# Altium PCB PDB.PcbDoc
Units mil, origin at the board's own origin, x right, y up, seen from the top; angles counter-clockwise.
Board outline 4930 x 2490 mil, 2 copper layers (Top Layer, Bottom Layer); 48 components, 33 nets, 136 pads, 994 vias.
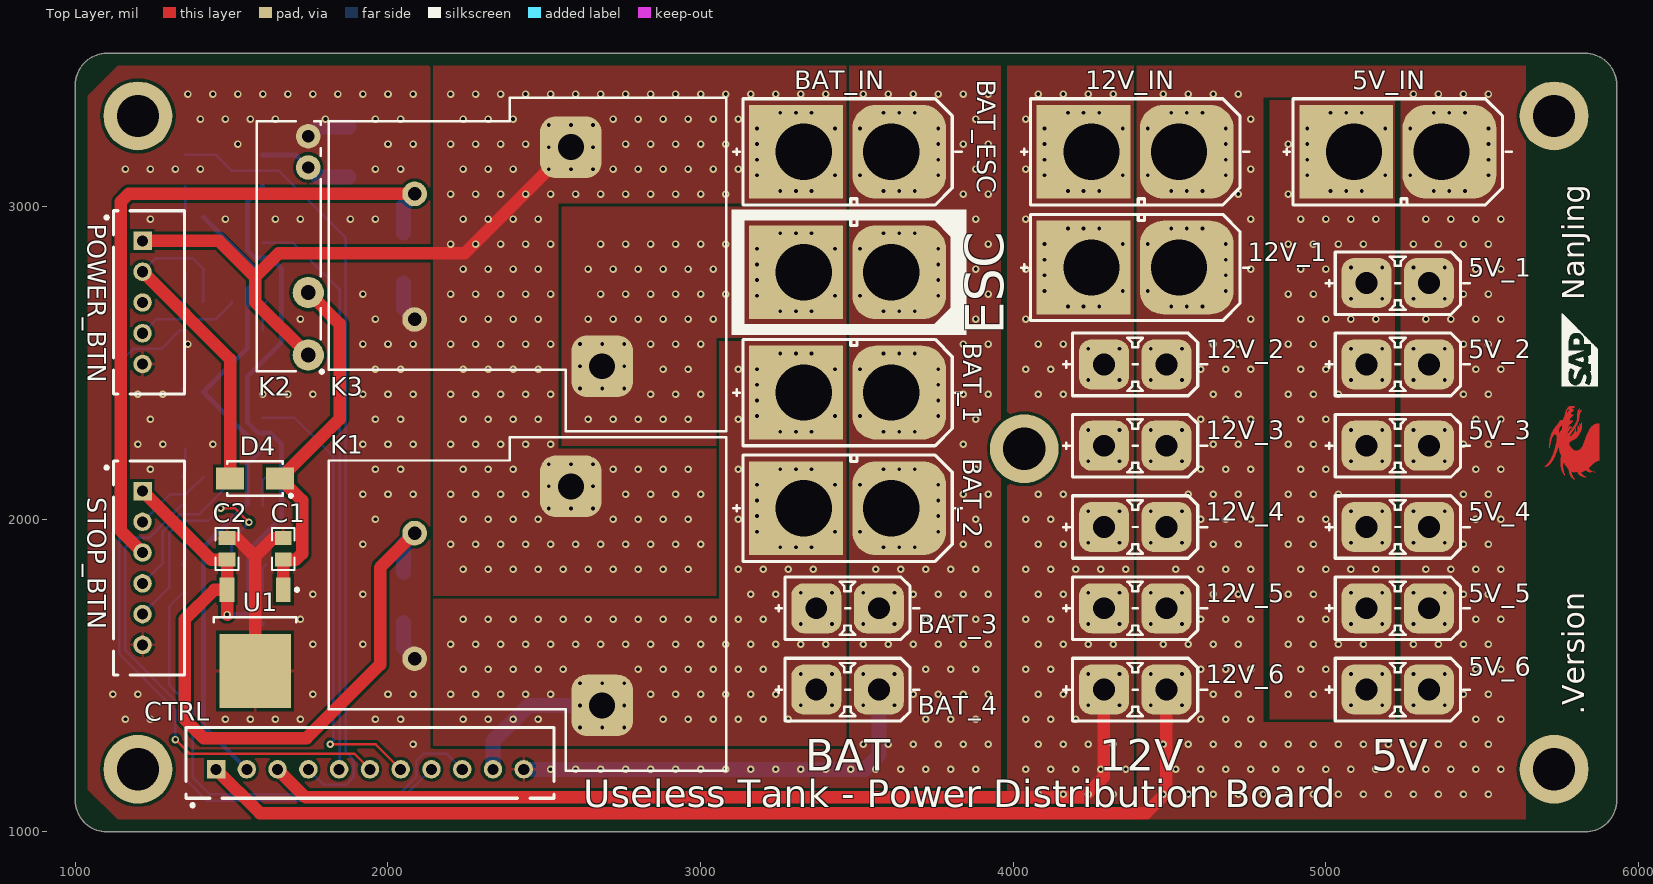
[diagram p0: Top Layer view]
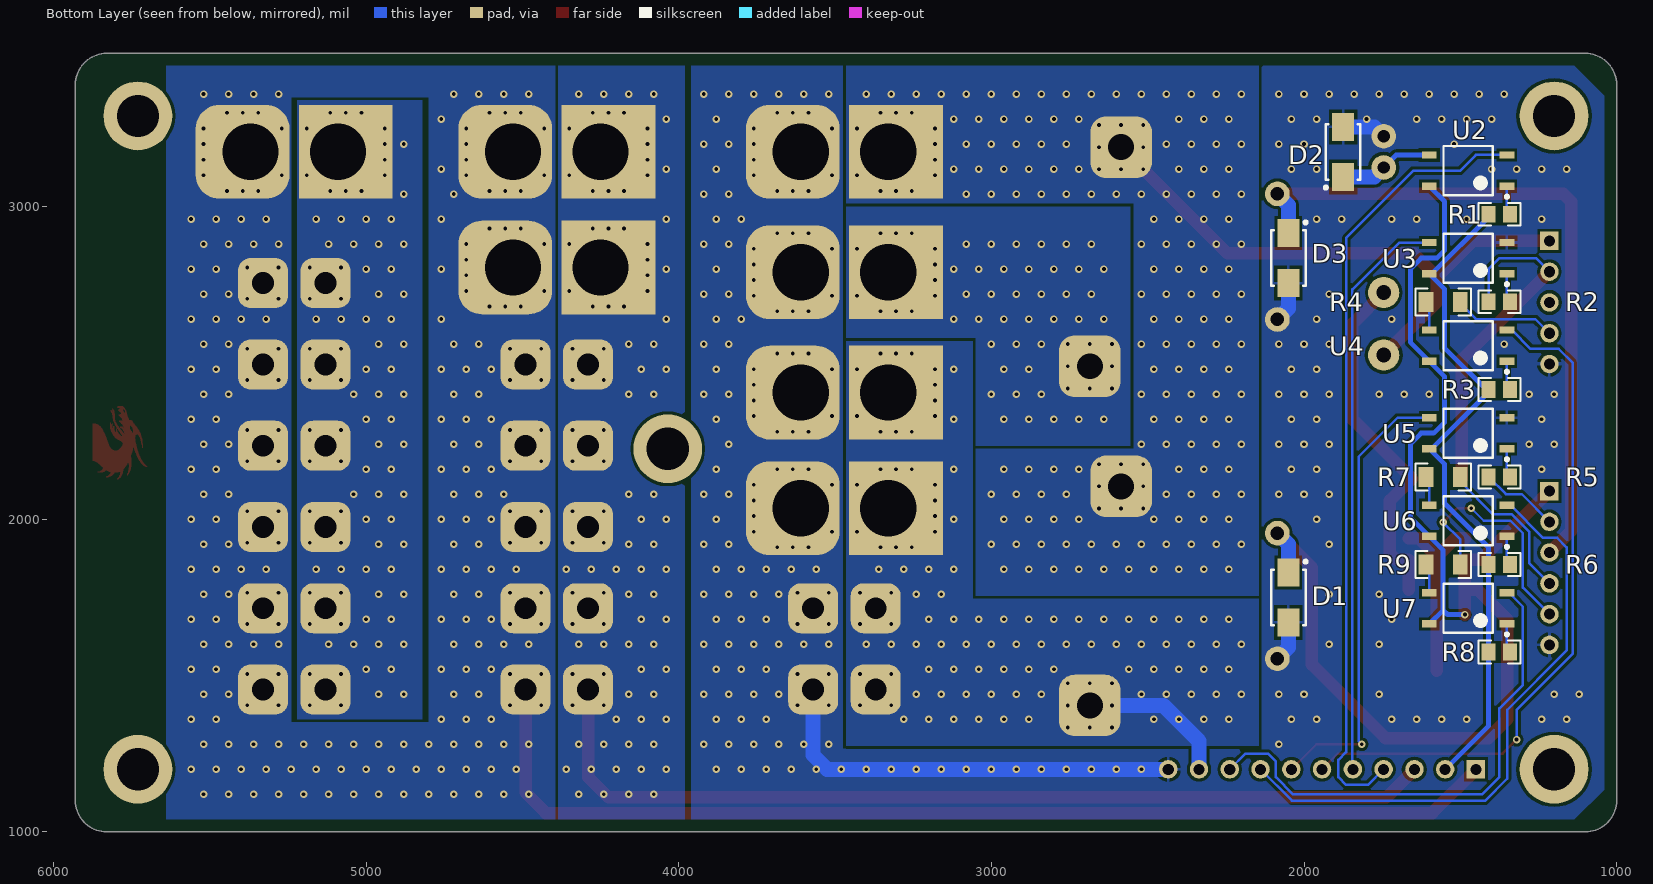
[diagram p1: Bottom Layer view, seen from below]

## Layer stack, top to bottom
Top Solder: solder mask 0.4, Solder Resist, Dk 3.5
Top Layer: signal copper 1.4
Dielectric 1: dielectric 12.6, FR-4, Dk 4.8
Bottom Layer: signal copper 1.4
Bottom Solder: solder mask 0.4, Solder Resist, Dk 3.5

## Board outline
1100,1000 cw(c1100,1100) 1000,1100 1000,3390 cw(c1100,3390) 1100,3490 5830,3490 cw(c5830,3390) 5930,3390 5930,1100 cw(c5830,1100) 5830,1000

## Design rules (kind name [scope] priority, off if disabled: settings)
Clearance [All] p1: gap=8 except(10: Arc-Poly Track-Poly SMDPad-Poly THPad-Poly Via-Poly Fill-Poly Poly-Poly)
ComponentClearance [All] p1: gap=8 collisioncheckmode=3 verticalgap=10 showdistances=FALSE
HoleSize [All] p1: absolutevalues=TRUE maxlimit=200 minlimit=12 maxpercent=80.000 minpercent=20.000
MinimumSolderMaskSliver [All] p1: minsoldermaskwidth=8
PolygonConnect "Full Connect" [IsVia OR (HasFootprint('XT60PB-M') OR HasFootprint('XT60PB-F') OR HasFootprint('XT30UPB-F') OR HasFootprint('HF105F-1') OR HasFootprint('HF49FD/xxx-1Hx1'))] p1: connectstyle=Direct reliefconductorwidth=10 reliefentries=4 polygonreliefangle="90 Angle" airgapwidth=10
PolygonConnect [All] p2: connectstyle=Relief reliefconductorwidth=10 reliefentries=4 polygonreliefangle="90 Angle" airgapwidth=10
RoutingVias [All] p1: holewidth=12 width=24 viastyle="Through Hole" minholewidth=12 minwidth=20 maxholewidth=50 maxwidth=80
SilkToSilkClearance SilkToSilkClearance_ignore [All] p1: silktosilkclearance=0
SilkToSilkClearance [All] p2: silktosilkclearance=8
SilkToSolderMaskClearance [IsPad] p1: minsilkscreentomaskgap=6 clearancetoexposedcopper=TRUE
SolderMaskExpansion SolderMaskExpansion_Via [IsVia] p1: expansion=-20
SolderMaskExpansion [All] p2: expansion=4
Width [All] p1: maxlimit=400 minlimit=8 preferedwidth=8
25 further rules are at their usual default settings.

## Components (designator, comment, footprint, x,y, rotation, side; value= is the part's Value field where it differs from the comment)
5V_1 "XT30/60/90" XT30UPB-F 5330,2755 r180 top
5V_2 "XT30/60/90" XT30UPB-F 5330,2495 r180 top
5V_3 "XT30/60/90" XT30UPB-F 5330,2235 r180 top
5V_4 "XT30/60/90" XT30UPB-F 5330,1975 r180 top
5V_5 "XT30/60/90" XT30UPB-F 5330,1715 r180 top
5V_6 "XT30/60/90" XT30UPB-F 5330,1455 r180 top
5V_IN "XT30/60/90" XT60PB-M 5370,3175 r180 top
12V_1 "XT30/60/90" XT60PB-F 4530,2805 r180 top
12V_2 "XT30/60/90" XT30UPB-F 4490,2495 r180 top
12V_3 "XT30/60/90" XT30UPB-F 4490,2235 r180 top
12V_4 "XT30/60/90" XT30UPB-F 4490,1975 r180 top
12V_5 "XT30/60/90" XT30UPB-F 4490,1715 r180 top
12V_6 "XT30/60/90" XT30UPB-F 4490,1455 r180 top
12V_IN "XT30/60/90" XT60PB-M 4530,3175 r180 top
BAT_1 "XT30/60/90" XT60PB-F 3610,2405 r180 top
BAT_2 "XT30/60/90" XT60PB-F 3610,2035 r180 top
BAT_3 "XT30/60/90" XT30UPB-F 3570,1715 r180 top
BAT_4 "XT30/60/90" XT30UPB-F 3570,1455 r180 top
BAT_ESC "XT30/60/90" XT60PB-F 3610,2790 r180 top
BAT_IN "XT30/60/90" XT60PB-M 3610,3175 r180 top
C1 "Cap" CAP0805_M 1665,1905 r270 top
C2 "Cap" CAP0805_M 1485,1905 r270 top
CTRL "XH2.54_11" XH_TH_TOP_11 1450,1200 r90 top
D1 "Diode US1M" DO-214AC 2050,1750 r270 bottom
D2 "Diode US1M" DO-214AC 1875,3175 r90 bottom
D3 "Diode US1M" DO-214AC 2050,2835 r270 bottom
D4 "Diode US1M" DO-214AC 1575,2130 r180 top
K1 "Relay HF105F-1" HF105F-1 2585,2105 r270 top
K2 "Relay HF49FD/012-1H11" HF49FD/xxx-1Hx1 1745,2525 r90 top
K3 "Relay HF105F-1" HF105F-1 2585,3190 r270 top
POWER_BTN "XH2.54_5" XH_TH_TOP_5 1215,2890 r0 top
R1 "Res2" RES0805_M 1375,2975 r180 bottom
R2 "Res2" RES0805_M 1375,2695 r0 bottom
R3 "Res2" RES0805_M 1375,2415 r180 bottom
R4 "Res2" RES1206_M 1555,2695 r180 bottom
R5 "Res2" RES0805_M 1375,2135 r180 bottom
R6 "Res2" RES0805_M 1375,1855 r180 bottom
R7 "Res2" RES1206_M 1555,2135 r0 bottom
R8 "Res2" RES0805_M 1375,1575 r180 bottom
R9 "Res2" RES1206_M 1555,1855 r180 bottom
STOP_BTN "XH2.54_6" XH_TH_TOP_6 1215,2090 r0 top
U1 "12V 1.5A" CJ7812_TO-252-2L 1575,1605 r270 top
U2 "Optoisolator TLP187" TLP187 1475,3115 r0 bottom
U3 "Optoisolator TLP187" TLP187 1475,2835 r0 bottom
U4 "Optoisolator TLP187" TLP187 1475,2555 r0 bottom
U5 "Optoisolator TLP187" TLP187 1475,2275 r0 bottom
U6 "Optoisolator TLP187" TLP187 1475,1995 r0 bottom
U7 "Optoisolator TLP187" TLP187 1475,1715 r0 bottom

## Footprints (in the part's own frame and the unit in brackets; to place one, negate y for a bottom-side part, rotate by r counter-clockwise, add the part's x,y. Pads: shape width x height; smd on the part's side, far side on the other; paste and mask are expansions set on the pad)
CAP0805_M [mm] "Chip Capacitor, 2-Leads, Body 2.00x1.25mm, IPC Medium Density"
  rect 1.15x1.35 smd: 1(-0.875,0) 2(0.875,0)
  silkscreen extent -1.7,-0.92 1.7,0.92, body extent -1.1,-0.67 1.1,0.67, height 0.7
CJ7812_TO-252-2L [mm] "D-PAK, 3-Pads, Body 6.20x6.71mm (max), IPC Medium Density"
  rect 2x1.2 smd: 1(-4.3,2.285) 3(-4.3,-2.285)
  rect 6x5.8 smd: 2(2.3,0)
  silkscreen extent -4.42,-3.35 -1.65,3.53, body extent -2.05,-3.35 4.15,3.35, height 2.38
DO-214AC [mil] "Molded Diode, 2-Leads, Body 4.25x2.67mm, IPC Medium Density"
  rect 90x70 smd: 1(-80,0) 2(80,0)
  silkscreen extent -119,-55 89,60, body extent -89,-55 89,55, height 95
HF49FD/xxx-1Hx1 [mm] "Relay HF49FD/xxx-1Hx1"
  round 2.54 hole 1.2: 1(0,0) 2(5.08,0)
  round 2 hole 1: 3(15.24,0) 4(17.78,0)
  silkscreen extent -1.48,-1.23 19,4.2, body extent -1.3,-1 19,4.2, height 12.8
HF105F-1 [mm] "Relay HF105F-1"
  rrect50% 5x5 hole 2.1: 1(0,0) 2(17.8,2.54)
  round 2 hole 1.1: 3(3.8,-12.7) 4(14,-12.7)
  silkscreen extent -4,-19.66 23.1,12.64, body extent -4,-19.66 23.1,12.64, height 20.2
RES0805_M [mm] "Chip Resistor, 2-Leads, Body 2.00x1.25mm, IPC Medium Density"
  rect 1.15x1.35 smd: 1(-0.875,0) 2(0.875,0)
  silkscreen extent -1.7,-0.92 1.7,0.92, body extent -1.1,-0.67 1.1,0.67, height 0.7
RES1206_M [mm] "Chip Resistor, 2-Leads, Body 3.13x1.55mm, IPC Medium Density"
  rect 1.2x1.65 smd: 1(-1.4,0) 2(1.4,0)
  silkscreen extent -2.25,-1.1 2.25,1.1, body extent -1.63,-0.82 1.63,0.82, height 0.7
TLP187 [mm] "SOP, 4-Leads, Body 3.75x4.60mm, Pitch 2.54mm, IPC Medium Density"
  rect 1.2x0.6 smd: 1(-3.15,1.27) 2(-3.15,-1.27) 3(3.15,-1.27) 4(3.15,1.27)
  silkscreen extent -3.27,-2 2,2.24, body extent -2.4,-2 2.4,2, height 2.3
XH_TH_TOP_5 [mm] "JST XH, Through Hole, Top Mount, 5Pin"
  rect 1.5x1.5 hole 0.9: 1(0,0)
  round 1.5 hole 0.9: 2(0,-2.5) 3(0,-5) 4(0,-7.5) 5(0,-10)
  silkscreen extent -3.05,-12.45 3.4,2.45
XH_TH_TOP_6 [mm] "JST XH, Through Hole, Top Mount, 6Pin"
  rect 1.5x1.5 hole 0.9: 1(0,0)
  round 1.5 hole 0.9: 2(0,-2.5) 3(0,-5) 4(0,-7.5) 5(0,-10) 6(0,-12.5)
  silkscreen extent -3.05,-14.95 3.4,2.45
XH_TH_TOP_11 [mm] "JST XH, Through Hole, Top Mount, 11Pin"
  rect 1.5x1.5 hole 0.9: 1(0,0)
  round 1.5 hole 0.9: 2(0,-2.5) 3(0,-5) 4(0,-7.5) 5(0,-10) 6(0,-12.5) 7(0,-15) 8(0,-17.5) 9(0,-20) 10(0,-22.5) 11(0,-25)
  silkscreen extent -3.05,-27.45 3.4,2.45
XT30UPB-F [mil]
  rrect50% 160x160 hole 70: GND(0,0) VCC(200,0)
  silkscreen extent -130,-100 330,100, body extent -100,-100 300,100, height 370
XT60PB-F [mil]
  rrect50% 300x300 hole 180 copper offset -25,0: GND(0,0)
  rect 300x300 hole 180 copper offset 25,0: VCC(280,0)
  silkscreen extent -225,-170 505,170, body extent -195,-170 475,170, height 630
XT60PB-M [mil]
  rrect50% 300x300 hole 180 copper offset -25,0: GND(0,0)
  rect 300x300 hole 180 copper offset 25,0: VCC(280,0)
  silkscreen extent -225,-170 505,170, body extent -195,-170 475,170, height 630

## Part data
C1 C2: "Capacitor"
D1 D2 D3 D4: "High Conductance Fast Diode"
K1 K3: "30A Single-Pole Single-Throw Relay"
K2: "5A Single-Pole Single-Throw Relay"
R1 R2 R3 R4 R5 R6 R7 R8 R9: "Resistor"
U1: library part CJ7812, "Voltage Regulator 12V 1.5A"
U2 U3 U4 U5 U6 U7: "4-Pin Phototransistor Optocoupler"

## Free pads (board coordinates)
  round 220 hole 135: ""(1200,1200) ""(1200,3290) ""(4035,2225) ""(5730,1200) ""(5730,3290)

## Via types
v1: diameter 24, hole 12, Top Layer to Bottom Layer, 962 vias
v2: diameter 24.02, hole 12, Top Layer to Bottom Layer, 32 vias

## Nets (pads, with @x,y where several pads share a name; then routed paths per layer and width w, separated by ;. In a path a pad name is that pad's centre, name@x,y a point inside that pad or via, vN(x,y) a via of type N, cw(c..) or ccw(c..) an arc to the next point about the centre after c; other vN are vias at no path point)
GND: 5V_1.GND 5V_2.GND 5V_3.GND 5V_4.GND 5V_5.GND 5V_6.GND 5V_IN.GND 12V_1.GND 12V_2.GND 12V_3.GND 12V_4.GND 12V_5.GND 12V_6.GND 12V_IN.GND CTRL.1 | length 3454.9
  Top Layer w40: CTRL.1 1590,1060 4425,1060 4490,1125 12V_6.GND
  other v1: 4480,1120 4560,1120 4640,1120 4720,1120 4800,1120 4880,1120 4960,1120 5040,1120 5120,1120 5200,1120 5280,1120 5360,1120 5440,1120 5520,1120 4520,1200 4600,1200 4680,1200 4760,1200 4840,1200 4920,1200 5000,1200 5080,1200 5160,1200 5240,1200 5320,1200 5400,1200 5480,1200 5560,1200 4480,1280 4560,1280 4640,1280 4720,1280 4800,1280 4880,1280 4960,1280 5040,1280 5120,1280 5200,1280 5280,1280 5360,1280 5440,1280 5520,1280 4600,1360 4680,1360 4760,1360 5480,1360 5560,1360 4440,1405 4540,1405 5280,1405 5380,1405 4640,1440 4720,1440 5440,1440 5520,1440 4440,1505 4540,1505 5280,1505 5380,1505 4600,1520 4680,1520 4760,1520 5480,1520 5560,1520 4480,1600 4560,1600 4640,1600 4720,1600 5280,1600 5360,1600 5440,1600 5520,1600 4440,1665 4540,1665 5280,1665 5380,1665 4600,1680 4680,1680 4760,1680 5480,1680 5560,1680 4640,1760 4720,1760 5440,1760 5520,1760 4440,1765 4540,1765 5280,1765 5380,1765 4520,1840 4600,1840 4680,1840 4760,1840 5320,1840 5400,1840 5480,1840 5560,1840 4640,1920 4720,1920 5440,1920 5520,1920 4440,1925 4540,1925 5280,1925 5380,1925 4600,2000 4680,2000 4760,2000 5480,2000 5560,2000 4440,2025 4540,2025 5280,2025 5380,2025 4560,2080 4640,2080 4720,2080 5440,2080 5520,2080 4600,2160 4680,2160 4760,2160 5480,2160 5560,2160 4440,2185 4540,2185 5280,2185 5380,2185 4640,2240 4720,2240 5440,2240 5520,2240 4440,2285 4540,2285 5280,2285 5380,2285 4600,2320 4680,2320 4760,2320 5480,2320 5560,2320 4640,2400 4720,2400 5440,2400 5520,2400 4440,2445 4540,2445 5280,2445 5380,2445 4600,2480 4680,2480 4760,2480 5480,2480 5560,2480 4440,2545 4540,2545 5280,2545 5380,2545 4640,2560 4720,2560 5440,2560 5520,2560 4760,2640 5320,2640 5400,2640 5480,2640 5560,2640 4505,2680 4555,2680 4605,2680 5280,2705 5380,2705 5440,2720 5520,2720 4430,2730 4680,2730 4680,2780 4760,2800 5480,2800 5560,2800 5280,2805 5380,2805 4680,2830 4430,2880 4680,2880 5280,2880 5360,2880 5440,2880 5520,2880 4505,2930 4555,2930 4605,2930 4760,2960 5320,2960 5400,2960 5480,2960 5560,2960 4720,3040 4505,3050 4555,3050 4605,3050 5345,3050 5395,3050 5445,3050 4430,3100 4680,3100 5270,3100 5520,3100 4760,3120 4680,3150 5520,3150 4680,3200 5520,3200 4430,3250 4680,3250 5270,3250 5520,3250 4760,3280 4505,3300 4555,3300 4605,3300 5345,3300 5395,3300 5445,3300 4480,3360 4560,3360 4640,3360 4720,3360 5280,3360 5360,3360 5440,3360 5520,3360
GND_BAT: BAT_1.GND BAT_2.GND BAT_3.GND BAT_4.GND BAT_ESC.GND BAT_IN.GND C1.1 C2.1 CTRL.11 D1.2 D2.2 D3.2 K1.4 K2.4 K3.4 POWER_BTN.5 STOP_BTN.6 U1.2 U3.2 U5.2 | length 2363
  Top Layer w40: C2.1 1515.55,1939.45 1575,1880 ; U1.2 1575,1880 ; C1.1 1634.45,1939.45 1575,1880
  Bottom Layer w48: K2.4 1775,3255 D2.2 ; D1.2 2050,1588.82 K1.4 ; D3.2 2050,2673.82 K3.4 ; CTRL.11 3525,1200 3570,1245 BAT_4.GND
  other v1: 2520,1200 2600,1200 2680,1200 2760,1200 2840,1200 2920,1200 3000,1200 3080,1200 3160,1200 3240,1200 3320,1200 3400,1200 3480,1200 3560,1200 3640,1200 3720,1200 3800,1200 3880,1200 2080,1280 3520,1280 3600,1280 3680,1280 3760,1280 3840,1280 3920,1280 1160,1360 1240,1360 1480,1360 1560,1360 1640,1360 1720,1360 1960,1360 2040,1360 3720,1360 3800,1360 3880,1360 3520,1405 3620,1405 1120,1440 1200,1440 1760,1440 2000,1440 2080,1440 3680,1440 3760,1440 3840,1440 3920,1440 3520,1505 3620,1505 3720,1520 3800,1520 3880,1520 1760,1600 1920,1600 3520,1600 3600,1600 3680,1600 3760,1600 3840,1600 3920,1600 3520,1665 3620,1665 1720,1680 3720,1680 3800,1680 3880,1680 1760,1760 1920,1760 3680,1760 3760,1760 3840,1760 3920,1760 3520,1765 3620,1765 3560,1840 3640,1840 3720,1840 3800,1840 3880,1840 3585,1910 3635,1910 3685,1910 1920,1920 3840,1920 3920,1920 3510,1960 3760,1960 1960,2000 3880,2000 3760,2010 3760,2060 1920,2080 2000,2080 2080,2080 3840,2080 3920,2080 3510,2110 3760,2110 1240,2160 1960,2160 2040,2160 3585,2160 3635,2160 3685,2160 3880,2160 1200,2240 1280,2240 1440,2240 1920,2240 2000,2240 2080,2240 3840,2240 3585,2280 3635,2280 3685,2280 1240,2320 1960,2320 2040,2320 3880,2320 3510,2330 3760,2330 3760,2380 1200,2400 1280,2400 1600,2400 1680,2400 1760,2400 1920,2400 2000,2400 2080,2400 3840,2400 3920,2400 3760,2430 1960,2480 2040,2480 3510,2480 3760,2480 3880,2480 3585,2530 3635,2530 3685,2530 1360,2560 1920,2560 2000,2560 2080,2560 3840,2560 3920,2560 1720,2640 1960,2640 3800,2640 3880,2640 3585,2665 3635,2665 3685,2665 3510,2715 3760,2715 1920,2720 3840,2720 3920,2720 3760,2765 3880,2800 3760,2815 3510,2865 3760,2865 3840,2880 3920,2880 3585,2915 3635,2915 3685,2915 1240,2960 1480,2960 1640,2960 1720,2960 1880,2960 1960,2960 3800,2960 3880,2960 3840,3040 3920,3040 3585,3050 3635,3050 3685,3050 3510,3100 3760,3100 1160,3120 1240,3120 1320,3120 1400,3120 1960,3120 2040,3120 3880,3120 3760,3150 1520,3200 2000,3200 2080,3200 3760,3200 3840,3200 3920,3200 3510,3250 3760,3250 1400,3280 1480,3280 1560,3280 1640,3280 1800,3280 1960,3280 2040,3280 3880,3280 3585,3300 3635,3300 3685,3300 1360,3360 1440,3360 1520,3360 1600,3360 1680,3360 1760,3360 1840,3360 1920,3360 2000,3360 2080,3360 3520,3360 3600,3360 3680,3360 3760,3360 3840,3360 3920,3360
NetBAT_ESC_VCC: BAT_ESC.VCC K3.2
  other v1: 2640,2320 2720,2320 2800,2320 2880,2320 2960,2320 2840,2400 2920,2400 3000,2400 2880,2480 2960,2480 2840,2560 2920,2560 3000,2560 2640,2640 2720,2640 2800,2640 2880,2640 2960,2640 3040,2640 3120,2640 3255,2665 3305,2665 3355,2665 3180,2715 3430,2715 2680,2720 2760,2720 2840,2720 2920,2720 3000,2720 3080,2720 3180,2765 2640,2800 2720,2800 2800,2800 2880,2800 2960,2800 3040,2800 3120,2800 3180,2815 3180,2865 3430,2865 2680,2880 2760,2880 2840,2880 2920,2880 3000,2880 3080,2880 3255,2915 3305,2915 3355,2915
  other v2: 2614.13,2418.35 2685,2418.35 2755.87,2418.35 2614.13,2489.21 2755.87,2489.21 2614.13,2560.08 2685,2560.08 2755.87,2560.08
NetC1_2: C1.2 D4.1 K2.2 U1.1 | length 1148.4
  Top Layer w40: U1.1 U1.1 C1.2 1705.55,1870.55 1725,1890 1725,2060 D4.1 1845,2320 1845,2625 K2.2
NetD2_1: D2.1 K2.3 U2.3 | length 305
  Bottom Layer w16: U2.3 1705,3165 K2.3
  Bottom Layer w48: K2.3 1775,3095 D2.1
NetR1_2: R1.2 U2.1 | length 94.3
  Bottom Layer w8: R1.2 1350.98,2985.43 U2.1
NetR2_1: R2.1 U3.1 | length 94.3
  Bottom Layer w8: R2.1 1350.98,2705.43 U3.1
NetR3_2: R3.2 U4.1 | length 94.3
  Bottom Layer w8: R3.2 1350.98,2425.43 U4.1
NetR4_1: R4.1 U4.3 | length 94.6
  Bottom Layer w8: U4.3 1599.02,2683.9 R4.1
NetR5_2: R5.2 U5.1 | length 94.3
  Bottom Layer w8: R5.2 1350.98,2145.43 U5.1
NetR6_2: R6.2 U6.1 | length 94.3
  Bottom Layer w8: R6.2 1350.98,1865.43 U6.1
NetR7_2: R7.2 U6.3 | length 94.6
  Bottom Layer w8: U6.3 1599.02,2123.9 R7.2
NetR8_2: R8.2 U7.1 | length 94.3
  Bottom Layer w8: R8.2 1350.98,1585.43 U7.1
NetR9_1: R9.1 U7.3 | length 94.6
  Bottom Layer w8: U7.3 1599.02,1843.9 R9.1
PWR_BTN_DET: CTRL.5 U3.3 | length 1843.7
  Bottom Layer w8: U3.3 1695,2885 1845,2735 1845,1201.3 CTRL.5
PWR_BTN_DOWN: D4.2 POWER_BTN.2 R2.2 | length 1109.8
  Top Layer w40: POWER_BTN.2 1495,2511.57 D4.2
  Bottom Layer w8: POWER_BTN.2 1258.43,2835 1375,2835 1409.45,2800.55 R2.2
PWR_BTN_UP: POWER_BTN.3
PWR_CTRL: CTRL.4 U2.2 | length 2534.9
  Bottom Layer w8: U2.2 1450,3165 1500,3115 1650,3115 1865,2900 1865,1255 1890,1230 1890,1175 1865,1150 1795.28,1150 CTRL.4
PWR_LED: POWER_BTN.4 R4.2 | length 329.4
  Bottom Layer w8: POWER_BTN.4 1260.28,2640 1450,2640 1499.88,2689.88 R4.2
PWR_LED_CTRL: CTRL.6 U4.2 | length 2195.5
  Top Layer w8: v1(1320,1295) 1365,1250 1892.13,1250 CTRL.6
  Bottom Layer w8: v1(1320,1295) 1320,1390 1140,1570 1140,2500 1185,2545 1275,2545 1335,2605 U4.2
STOP_BTN_DET: CTRL.7 U5.3 | length 1460.6
  Top Layer w8: v1(1815,1280) 1960.55,1280 CTRL.7
  Bottom Layer w8: U5.3 1700,2325 1825,2200 1825,1290 v1(1815,1280)
STOP_BTN_DOWN: R5.1 STOP_BTN.2 | length 253.9
  Bottom Layer w8: STOP_BTN.2 1303.43,2080 1354.45,2080 R5.1
STOP_BTN_UP: D3.1 K3.3 STOP_BTN.3 | length 2241.3
  Top Layer w40: STOP_BTN.3 1145,1963.15 1145,3015 1170.39,3040.39 K3.3
  Bottom Layer w48: D3.1 2050,3005.39 K3.3
STOP_LED_G: R7.1 STOP_BTN.4 | length 493.4
  Bottom Layer w8: STOP_BTN.4 1280,1859.72 1280,1960 1335,2015 1395,2015 1499.88,2119.88 R7.1
STOP_LED_G_CTRL: CTRL.8 U6.2 | length 1925
  Bottom Layer w8: U6.2 1340,2045 1235,1940 1190,1940 1160,1910 1160,1580 1350,1390 1350,1170 1420,1100 2038.98,1100 CTRL.8
STOP_LED_R: R9.2 STOP_BTN.5 | length 768.5
  Top Layer w8: v1(1465,2035) 1510,2035 v1(1555,1990)
  Bottom Layer w8: STOP_BTN.5 1300,1781.3 1300,1955 1340,1995 1425,1995 v1(1465,2035) ; R9.2@1499.88,1839.88 R9.2@1499.88,1849.88 ; R9.2 1499.88,1934.88 v1(1555,1990)
STOP_LED_R_CTRL: CTRL.9 U7.2 | length 1634.7
  Bottom Layer w8: U7.2 1345,1765 1300,1720 1300,1470 1375,1395 1375,1175 1430,1120 2035,1120 2090,1175 2090,1225 2115,1250 2187.4,1250 CTRL.9
VCC_5V: 5V_1.VCC 5V_2.VCC 5V_3.VCC 5V_4.VCC 5V_5.VCC 5V_6.VCC 5V_IN.VCC
  other v1: 5080,1405 5180,1405 4880,1440 4960,1440 5080,1505 5180,1505 4920,1520 5000,1520 4880,1600 4960,1600 5040,1600 5120,1600 5080,1665 5180,1665 4920,1680 5000,1680 4880,1760 4960,1760 5080,1765 5180,1765 4920,1840 5000,1840 5080,1840 5160,1840 4880,1920 4960,1920 5080,1925 5180,1925 4920,2000 5000,2000 5080,2025 5180,2025 4880,2080 4960,2080 5040,2080 4920,2160 5000,2160 5080,2185 5180,2185 4880,2240 4960,2240 5080,2285 5180,2285 4920,2320 5000,2320 4880,2400 4960,2400 5040,2400 5080,2445 5180,2445 4920,2480 5000,2480 5080,2545 5180,2545 4880,2560 4960,2560 4920,2640 5000,2640 5080,2640 5160,2640 5080,2705 5180,2705 4880,2720 4960,2720 4920,2800 5000,2800 5080,2805 5180,2805 4880,2880 4960,2880 5040,2880 5120,2880 4920,2960 5000,2960 5080,2960 5160,2960 4880,3040 5015,3050 5065,3050 5115,3050 4940,3100 5190,3100 4940,3150 4880,3200 4940,3200 4940,3250 5190,3250 5015,3300 5065,3300 5115,3300
VCC_12V: 12V_1.VCC 12V_2.VCC 12V_3.VCC 12V_4.VCC 12V_5.VCC 12V_6.VCC 12V_IN.VCC CTRL.3 | length 2987.4
  Top Layer w40: CTRL.3 1736.85,1110 4225,1110 4290,1175 12V_6.VCC
  other v1: 4080,1120 4160,1120 4240,1120 4320,1120 4040,1200 4120,1200 4200,1200 4280,1200 4360,1200 4080,1280 4160,1280 4240,1280 4320,1280 4040,1360 4120,1360 4200,1360 4240,1405 4340,1405 4080,1440 4160,1440 4240,1505 4340,1505 4040,1520 4120,1520 4080,1600 4160,1600 4240,1600 4320,1600 4240,1665 4340,1665 4040,1680 4120,1680 4080,1760 4160,1760 4240,1765 4340,1765 4040,1840 4120,1840 4200,1840 4280,1840 4360,1840 4080,1920 4160,1920 4240,1925 4340,1925 4040,2000 4120,2000 4240,2025 4340,2025 4080,2080 4160,2080 4240,2185 4340,2185 4240,2285 4340,2285 4080,2400 4160,2400 4240,2445 4340,2445 4040,2480 4120,2480 4240,2545 4340,2545 4080,2560 4160,2560 4040,2640 4175,2680 4225,2680 4275,2680 4100,2730 4350,2730 4100,2780 4040,2800 4100,2830 4100,2880 4350,2880 4175,2930 4225,2930 4275,2930 4040,2960 4175,3050 4225,3050 4275,3050 4100,3100 4350,3100 4040,3120 4100,3150 4100,3200 4100,3250 4350,3250 4040,3280 4175,3300 4225,3300 4275,3300 4080,3360 4160,3360 4240,3360 4320,3360
VCC_BAT: BAT_1.VCC BAT_2.VCC BAT_3.VCC BAT_4.VCC CTRL.10 K1.2 | length 487
  Bottom Layer w48: CTRL.10 2335.83,1290.83 2449.21,1404.21 v2(2614.13,1404.21) K1.2
  other v1: 2240,1360 2320,1360 2400,1360 2480,1360 2880,1360 2960,1360 3040,1360 3120,1360 3200,1360 3280,1360 3320,1405 3420,1405 2200,1440 2280,1440 2360,1440 2440,1440 2520,1440 2840,1440 2920,1440 3000,1440 3080,1440 3160,1440 3240,1440 3320,1505 3420,1505 2240,1520 2320,1520 2400,1520 2480,1520 2560,1520 2800,1520 2880,1520 2960,1520 3040,1520 3120,1520 3200,1520 2200,1600 2280,1600 2360,1600 2440,1600 2520,1600 2600,1600 2680,1600 2760,1600 2840,1600 2920,1600 3000,1600 3080,1600 3160,1600 3240,1600 3320,1600 3400,1600 3320,1665 3420,1665 2240,1680 2320,1680 2400,1680 2480,1680 2560,1680 2640,1680 2720,1680 2800,1680 2880,1680 2960,1680 3040,1680 3120,1680 3200,1680 3160,1760 3240,1760 3320,1765 3420,1765 3120,1840 3200,1840 3280,1840 3360,1840 3255,1910 3305,1910 3355,1910 3180,1960 3430,1960 3120,2000 3180,2010 3180,2060 3180,2110 3430,2110 3120,2160 3255,2160 3305,2160 3355,2160 3255,2280 3305,2280 3355,2280 3120,2320 3180,2330 3430,2330 3180,2380 3180,2430 3120,2480 3180,2480 3430,2480 3255,2530 3305,2530 3355,2530
  other v2: 2614.13,1333.35 2685,1333.35 2755.87,1333.35 2755.87,1404.21 2614.13,1475.08 2685,1475.08 2755.87,1475.08
VCC_BAT_SRC: BAT_IN.VCC K1.1 K2.1 K3.1 POWER_BTN.1 | length 1909.9
  Top Layer w40: POWER_BTN.1 1460,2890 1575,2775 ; K2.1 1575,2695 1575,2775 ; K3.1 v2(2514.13,3119.13) 2245,2850 1650,2850 1575,2775
  other v1: 2240,1840 2320,1840 2400,1840 2480,1840 2560,1840 2640,1840 2720,1840 2800,1840 2880,1840 2960,1840 2200,1920 2280,1920 2360,1920 2440,1920 2520,1920 2600,1920 2680,1920 2760,1920 2840,1920 2920,1920 3000,1920 2240,2000 2320,2000 2400,2000 2480,2000 2720,2000 2800,2000 2880,2000 2960,2000 2200,2080 2280,2080 2360,2080 2440,2080 2760,2080 2840,2080 2920,2080 3000,2080 2240,2160 2320,2160 2400,2160 2720,2160 2800,2160 2880,2160 2960,2160 2200,2240 2280,2240 2360,2240 2440,2240 2520,2240 2240,2320 2320,2320 2400,2320 2480,2320 2200,2400 2280,2400 2360,2400 2440,2400 2520,2400 2240,2480 2320,2480 2400,2480 2480,2480 2200,2560 2280,2560 2360,2560 2440,2560 2520,2560 2240,2640 2320,2640 2400,2640 2480,2640 2200,2720 2280,2720 2360,2720 2440,2720 2520,2720 2240,2800 2320,2800 2400,2800 2480,2800 2200,2880 2280,2880 2360,2880 2440,2880 2520,2880 2240,2960 2320,2960 2400,2960 2480,2960 2200,3040 2280,3040 2360,3040 2440,3040 2520,3040 2600,3040 2680,3040 2760,3040 2840,3040 2920,3040 3000,3040 3080,3040 3255,3050 3305,3050 3355,3050 3180,3100 3430,3100 2240,3120 2320,3120 2400,3120 2720,3120 2800,3120 2880,3120 2960,3120 3040,3120 3120,3120 3180,3150 2200,3200 2280,3200 2360,3200 2440,3200 2760,3200 2840,3200 2920,3200 3000,3200 3080,3200 3180,3200 3180,3250 3430,3250 2240,3280 2320,3280 2400,3280 2720,3280 2800,3280 2880,3280 2960,3280 3040,3280 3120,3280 3255,3300 3305,3300 3355,3300 2200,3360 2280,3360 2360,3360 2440,3360 2520,3360 2600,3360 2680,3360 2760,3360 2840,3360 2920,3360 3000,3360 3080,3360 3160,3360 3240,3360 3320,3360 3400,3360
  other v2: 2514.13,2034.13 2585,2034.13 2655.87,2034.13 2514.13,2105 2655.87,2105 2514.13,2175.87 2585,2175.87 2655.87,2175.87 2585,3119.13 2655.87,3119.13 2514.13,3190 2655.87,3190 2514.13,3260.87 2585,3260.87 2655.87,3260.87
VCC_MCU: CTRL.2 R1.1 R3.1 R6.1 R8.1 U3.4 U5.4 | length 2147.6
  Bottom Layer w16: R1.1@1409.45,2966.61 1591.06,2785 U3.4 1550,2735.98 1550,2547.16 1409.45,2406.61 1591.06,2225 U5.4 1550,2175.98 1550,2050 1409.45,1909.45 R6.1 R8.1 1409.45,1338.98 CTRL.2
VCC_PDB_12V: C2.2 D1.1 K1.3 STOP_BTN.1 U1.3 U2.4 U4.4 U6.4 U7.4 | length 4130.8
  Top Layer w40: STOP_BTN.1 1434.45,1870.55 C2.2 ; v1(1485.04,1695) U1.3 ; C2.2@1485.04,1870.51 U1.3 ; K1.3 1975,1845.39 1975,1535 1740,1300 1410,1300 1350,1360 1350,1680 1444.29,1774.29 U1.3
  Bottom Layer w16: v1(1485.04,1695) 1540.98,1695 1555,1709.02 ; U7.4 1555,1709.02 ; U2.4 1550,3015.98 1550,2860 1575,2835 1625,2835 1660,2800 1660,2565.98 U4.4 1550,2455.98 1550,2310 1585,2275 1625,2275 1660,2240 1660,2005.98 U6.4 1555,1900.98 1555,1709.02
  Bottom Layer w48: D1.1 2050,1920.39 K1.3

## Polygon pours and split planes (outlines as drawn)
GND_BAT on Top Layer "Top Layer-PDB_GND" (solid, pour order 26): 2135,1040 1135,1040 1040,1135 1040,3355 1135,3450 2135,3450
NetBAT_ESC_VCC on Top Layer "Top Layer-NetBAT_ESC_VCC" (solid, pour order 22): 3465,3000 3465,2580 3050,2580 3050,2235 2555,2235 2555,3000
VCC_BAT_SRC on Top Layer "Top Layer-VCC_BAT_SRC" (solid, pour order 20): 3465,3010 3465,3450 2145,3450 2145,1755 3050,1755 3050,2225 2545,2225 2545,3010
VCC_BAT on Top Layer "Top Layer-VCC_BAT" (solid, pour order 23): 3465,2570 3465,1275 2145,1275 2145,1745 3060,1745 3060,2570
VCC_12V on Top Layer "Top Layer-Net12V_VCC" (solid, pour order 29): 4385,3450 3980,3450 3980,1090 4385,1090
GND on Top Layer "Top Layer-Net12V_GND" (solid, pour order 31): 4800,1350 5250,1350 5250,1040 4395,1040 4395,3450 5250,3450 5250,3350 4800,3350
VCC_5V on Top Layer "Top Layer-Net5V_VCC" (solid, pour order 33): 5220,3340 4820,3340 4820,1360 5220,1360
GND on Top Layer "Top Layer-Net5V_GND" (solid, pour order 35): 5240,1040 5640,1040 5640,3450 5240,3450
GND_BAT on Top Layer "Top Layer-GND_BAT" (solid, pour order 27): 3475,3450 3960,3450 3960,1140 2120,1140 2120,1265 3475,1265
GND_BAT on Bottom Layer "Bottom Layer-PDB_GND" (solid, pour order 24): 2135,1040 1135,1040 1040,1135 1040,3355 1135,3450 2135,3450
NetBAT_ESC_VCC on Bottom Layer "Bottom Layer-NetBAT_ESC_VCC" (solid, pour order 21): 3465,3000 3465,2580 3050,2580 3050,2235 2555,2235 2555,3000
VCC_BAT_SRC on Bottom Layer "Bottom Layer-VCC_BAT_SRC" (solid, pour order 19): 3465,3010 3465,3450 2145,3450 2145,1755 3050,1755 3050,2225 2545,2225 2545,3010
VCC_BAT on Bottom Layer "Bottom Layer-VCC_BAT" (solid, pour order 25): 3465,2570 3465,1275 2145,1275 2145,1745 3060,1745 3060,2570
GND_BAT on Bottom Layer "Bottom Layer-GND_BAT" (solid, pour order 28): 3475,3450 3960,3450 3960,1040 2120,1040 2120,1265 3475,1265
VCC_12V on Bottom Layer "Bottom Layer-Net12V_VCC" (solid, pour order 30): 4385,3450 3980,3450 3980,1040 4385,1040
GND on Bottom Layer "Bottom Layer-Net12V_GND" (solid, pour order 32): 4800,1350 5250,1350 5250,1040 4395,1040 4395,3450 5250,3450 5250,3350 4800,3350
VCC_5V on Bottom Layer "Bottom Layer-Net5V_VCC" (solid, pour order 34): 5220,3340 4820,3340 4820,1360 5220,1360
GND on Bottom Layer "Bottom Layer-Net5V_GND" (solid, pour order 36): 5240,3450 5640,3450 5640,1040 5240,1040
no net on Top Overlay "Top Overlay-ESC" (solid): 3850,2990 3100,2990 3100,2590 3850,2590

## Other copper
Top Layer:
  region: 1586 vertices and 2 holes, not listed, extent 5700.25,2127.61 5875,2361.82

## Silkscreen, mask and mechanical layers (free items; w line width, h text height)
Top Overlay:
  drawing of 4 lines, arcs and shapes, not listed
  text "NanJing" at 5850,2700 h120 r90
  text "ESC" at 4010,2590 h210 r90
  text ".Version" at 5850,1375 h120 r90
  text "BAT" at 3335,1195 h100
  text "12V" at 4275,1195 h100
  text "5V" at 5145,1195 h100
  text "Useless Tank - Power Distribution Board" at 2625,1050 h150
Mechanical 1:
  the board outline again, w10
Drill Drawing:
  circle w1: c6150.62,2427.5 r25
  circle w1: c6150.62,1227.5 r15
  circle w1: c6150.62,1227.5 r25
  lines w1: 6125.62,1365 6138.12,1365 6138.12,1352.5 6163.12,1352.5 6163.12,1365 6175.62,1365 6175.62,1390 6163.12,1390 6163.12,1402.5 6138.12,1402.5 6138.12,1390 6125.62,1390 6125.62,1365 ; 6125.62,1502.5 6175.62,1502.5 6175.62,1552.5 6125.62,1552.5 6125.62,1502.5 ; 6125.62,1665 6138.12,1665 6150.62,1652.5 6163.12,1665 6175.62,1665 6163.12,1677.5 6175.62,1690 6163.12,1690 6150.62,1702.5 6138.12,1690 6125.62,1690 6138.12,1677.5 6125.62,1665 ; 6125.62,1802.5 6125.62,1815 6138.12,1827.5 6125.62,1840 6125.62,1852.5 6138.12,1852.5 6150.62,1840 6163.12,1852.5 6175.62,1852.5 6175.62,1840 6163.12,1827.5 6175.62,1815 6175.62,1802.5 6163.12,1802.5 6150.62,1815 6138.12,1802.5 6125.62,1802.5 ; 6125.62,1952.5 6175.62,1952.5 6175.62,2002.5 6125.62,2002.5 6125.62,1952.5 ; 6125.62,2102.5 6150.62,2115 6175.62,2102.5 6163.12,2127.5 6175.62,2152.5 6150.62,2140 6125.62,2152.5 6138.12,2127.5 6125.62,2102.5 ; 6125.62,2277.5 6150.62,2252.5 6175.62,2277.5 6150.62,2302.5 6125.62,2277.5 ; 6135.62,1962.5 6165.62,1962.5 6165.62,1992.5 6135.62,1992.5 6135.62,1962.5
  lines w15: 6057.5,1157.5 9936.47,1157.5 ; 6057.5,2507.5 9936.47,2507.5 ; 6608.38,1007.5 6608.38,2657.5 ; 7306.19,1007.5 7306.19,2657.5 ; 8651.79,1007.5 8651.79,2657.5 ; 9157.67,1007.5 9157.67,2657.5 ; 6057.5,1007.5 9936.47,1007.5 9936.47,2657.5 6057.5,2657.5 6057.5,1007.5
  text "Symbol" at 6147.5,2552.5 h72
  text "Hit Count" at 6653.38,2552.5 h72
  text "Finished Hole Size" at 7351.19,2552.5 h72
  text "Plated" at 8696.79,2552.5 h72
  text "Hole Type" at 9202.67,2552.5 h72
  text "2" at 6653.38,2402.5 h60
  text "39.37mil (1.000mm)" at 7351.19,2402.5 h60
  text "PTH" at 8696.79,2402.5 h60
  text "Round" at 9202.67,2402.5 h60
  text "2" at 6653.38,2252.5 h60
  text "47.24mil (1.200mm)" at 7351.19,2252.5 h60
  text "PTH" at 8696.79,2252.5 h60
  text "Round" at 9202.67,2252.5 h60
  text "4" at 6653.38,2102.5 h60
  text "43.31mil (1.100mm)" at 7351.19,2102.5 h60
  text "PTH" at 8696.79,2102.5 h60
  text "Round" at 9202.67,2102.5 h60
  text "4" at 6653.38,1952.5 h60
  text "82.68mil (2.100mm)" at 7351.19,1952.5 h60
  text "PTH" at 8696.79,1952.5 h60
  text "Round" at 9202.67,1952.5 h60
  text "5" at 6653.38,1802.5 h60
  text "135.00mil (3.429mm)" at 7351.19,1802.5 h60
  text "PTH" at 8696.79,1802.5 h60
  text "Round" at 9202.67,1802.5 h60
  text "14" at 6653.38,1652.5 h60
  text "180.00mil (4.572mm)" at 7351.19,1652.5 h60
  text "PTH" at 8696.79,1652.5 h60
  text "Round" at 9202.67,1652.5 h60
  text "22" at 6653.38,1502.5 h60
  text "35.43mil (0.900mm)" at 7351.19,1502.5 h60
  text "PTH" at 8696.79,1502.5 h60
  text "Round" at 9202.67,1502.5 h60
  text "26" at 6653.38,1352.5 h60
  text "70.00mil (1.778mm)" at 7351.19,1352.5 h60
  text "PTH" at 8696.79,1352.5 h60
  text "Round" at 9202.67,1352.5 h60
  text "994" at 6653.38,1202.5 h60
  text "12.00mil (0.305mm)" at 7351.19,1202.5 h60
  text "PTH" at 8696.79,1202.5 h60
  text "Round" at 9202.67,1202.5 h60
  text "1073 Total" at 6653.38,1052.5 h60